# Altium PCB DTMF-FSK.PcbDoc
Units mil, origin at the board's own origin, x right, y up, seen from the top; angles counter-clockwise.
Board outline 1965 x 2035 mil, 2 copper layers (Top Layer, Bottom Layer); 52 components, 40 nets, 154 pads, 7 vias.
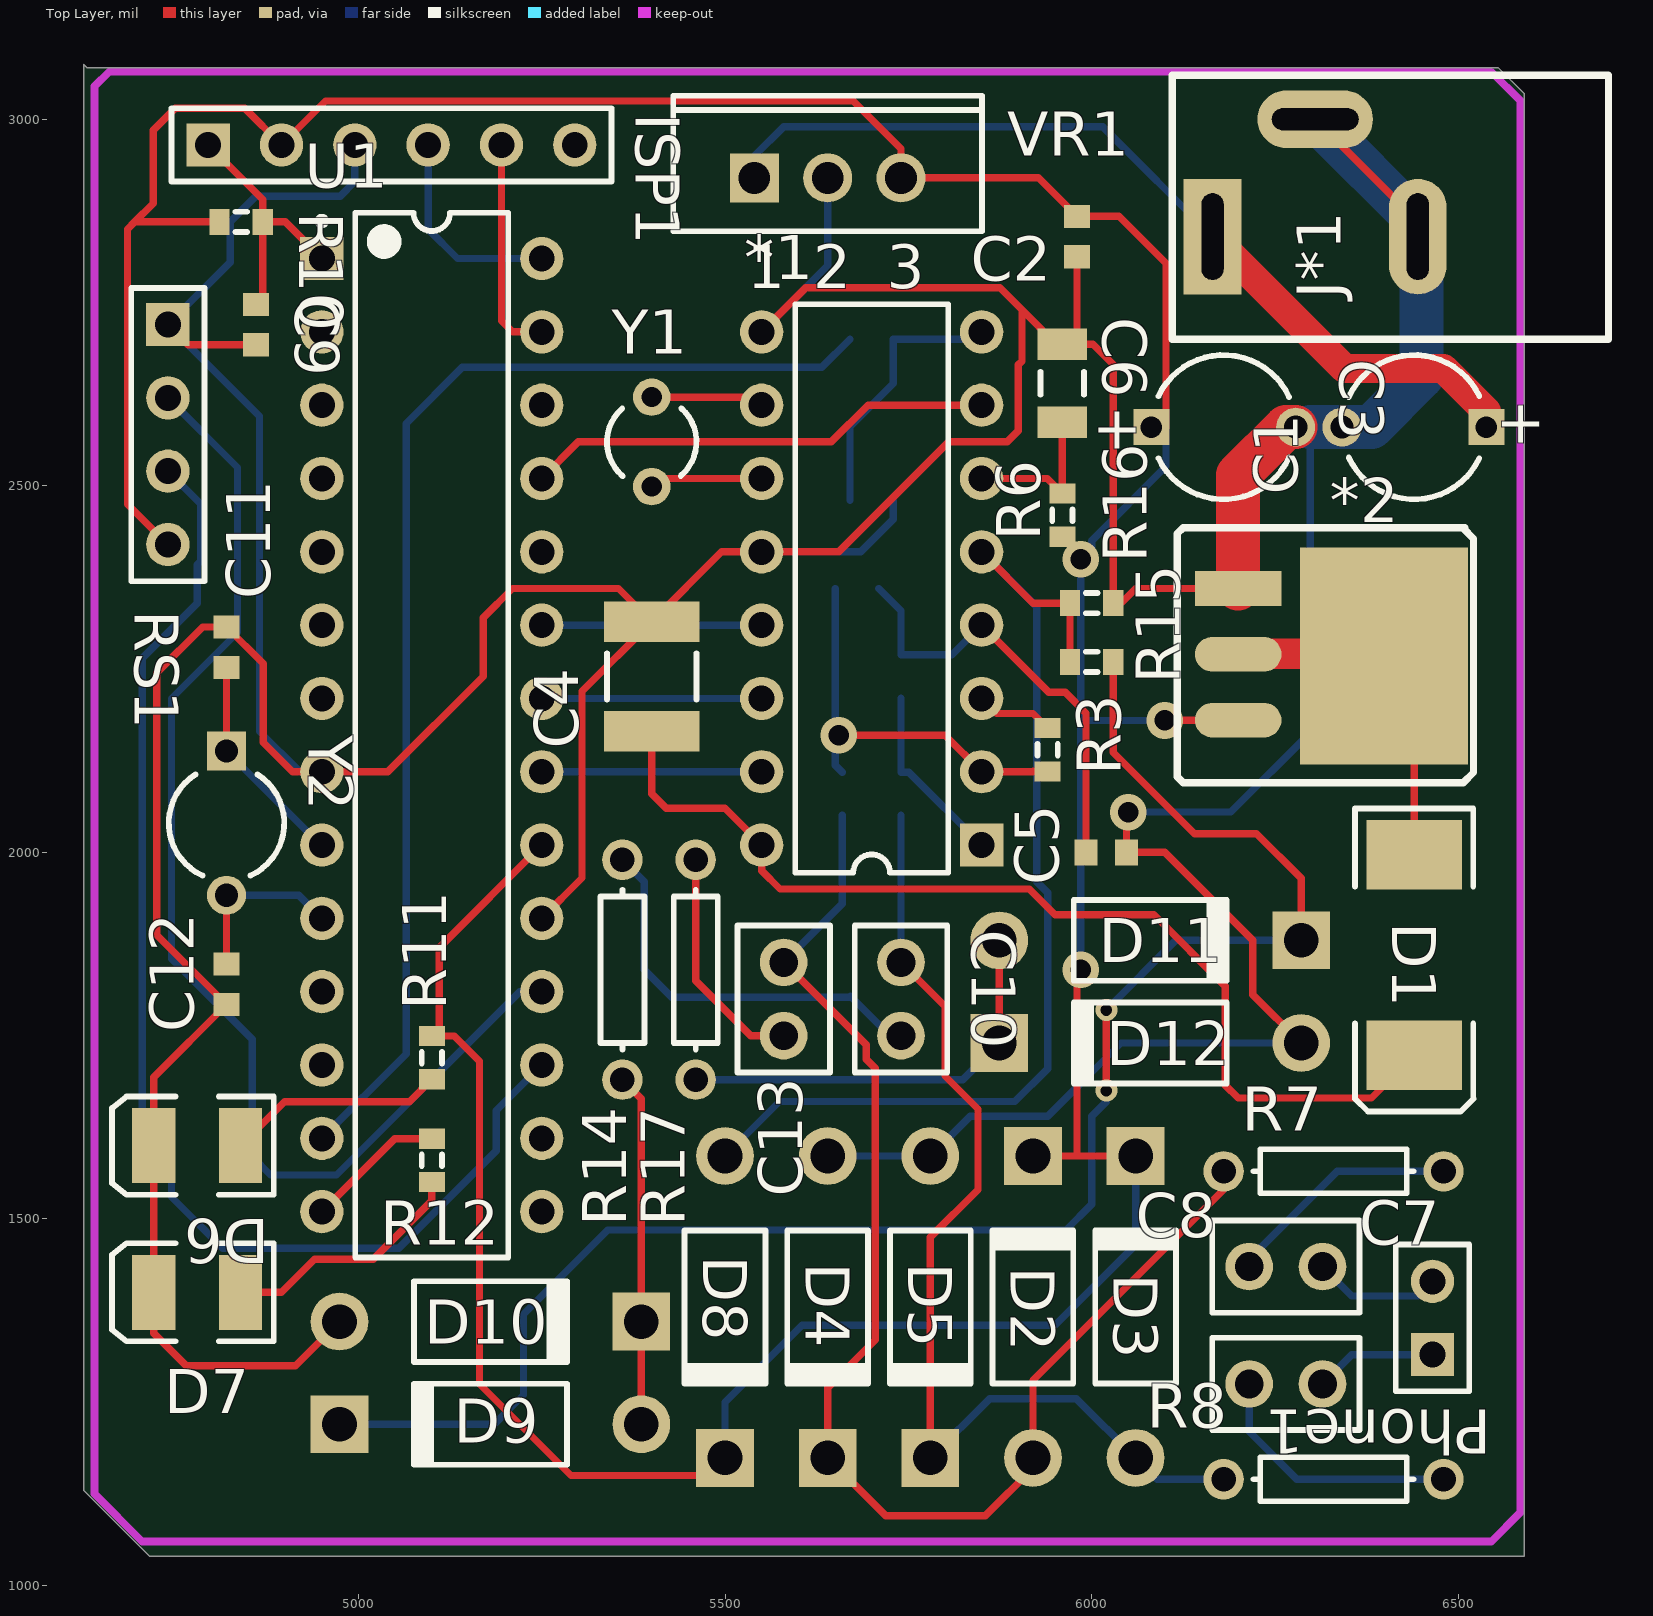
[diagram p0: Top Layer view]
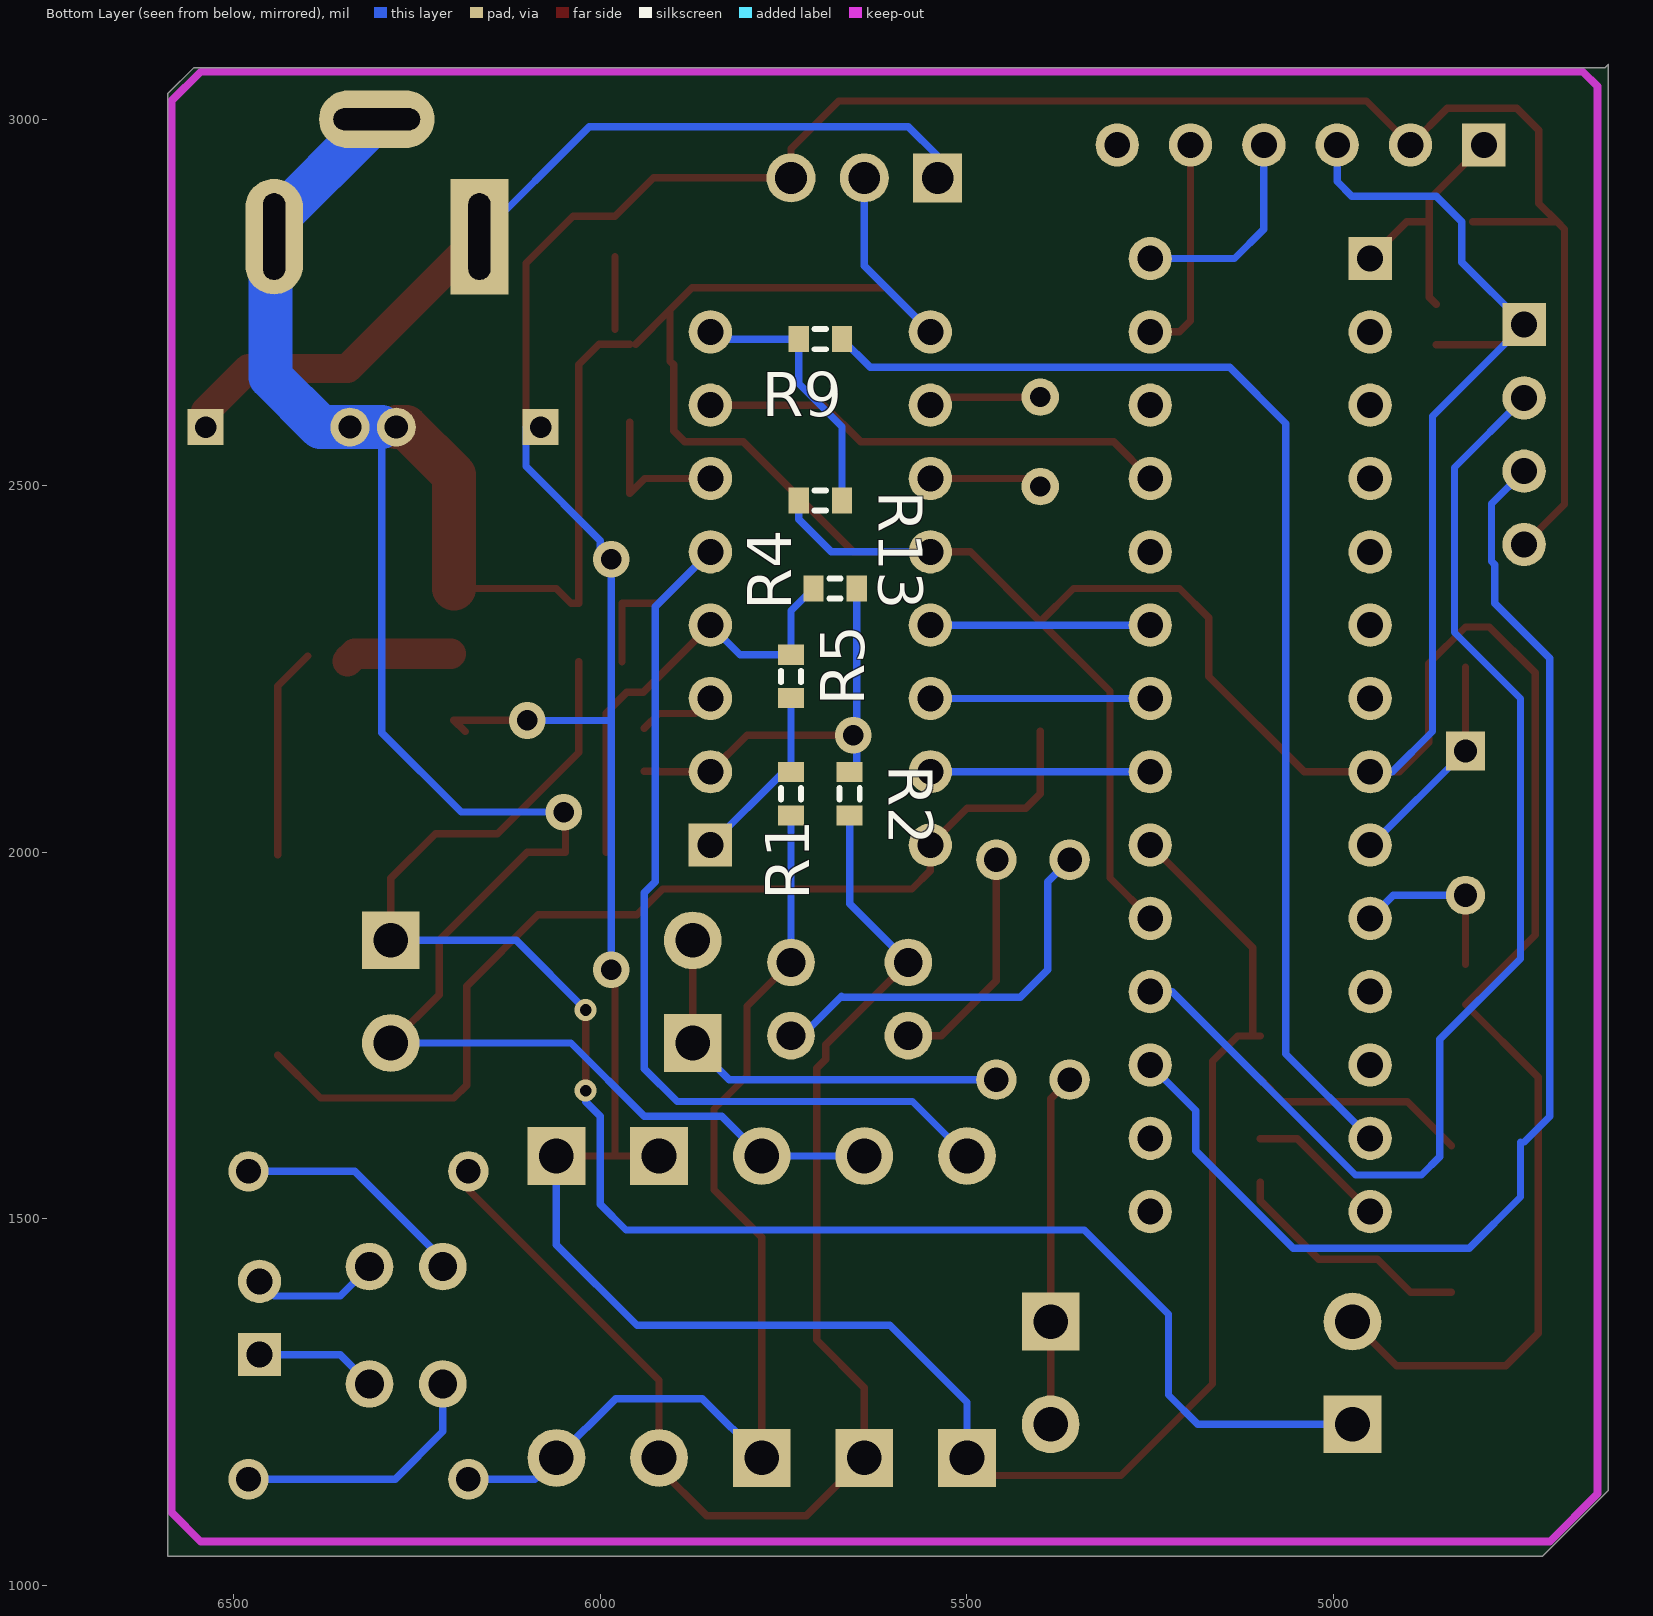
[diagram p1: Bottom Layer view, seen from below]

## Layer stack, top to bottom
Top Layer: signal copper 1.4
Dielectric: dielectric 12.6, FR-4, Dk 4.8
Bottom Layer: signal copper 1.4

## Board outline
4625,3075 4630,3070 6550,3070 6555,3070 6590,3035 6590,1040 4715,1040 4625,1130

## Design rules (kind name [scope] priority, off if disabled: settings)
Clearance Clearance_4 [InNamedPolygon('Bottom Layer-No Net') Or  InNamedPolygon('Bottom Layer-No Net')] p1: gap=30
Clearance Clearance_3 [InNamedPolygon('Bottom Layer-No Net')] p2: gap=30
Clearance Clearance_2 [InNet() And OnLayer()] p3: gap=30
Clearance Clearance_1 [InNamedPolygon('Bottom Layer-No Net') Or  InNamedPolygon('Bottom Layer-No Net')] p4: gap=30
Clearance [All] p5: gap=10
PolygonConnect [All] p1: connectstyle=Relief reliefconductorwidth=10 reliefentries=4 polygonreliefangle="90 Angle"
RoutingVias [All] p1: holewidth=28 width=50 viastyle="Through Hole" minholewidth=28 minwidth=50 maxholewidth=28 maxwidth=50
SilkscreenOverComponentPads [All] p1: minsilkscreentomaskgap=10
SolderMaskExpansion [All] p1: expansion=4
Width [All] p1: maxlimit=80 minlimit=10 preferedwidth=10
27 further rules are at their usual default settings.

## Components (designator, comment, footprint, x,y, rotation, side; value= is the part's Value field where it differs from the comment)
*1 "SM8223" NE016 5700,2360 r90 top
*2 "LM1117" LM1117 6200,2360 r270 top
C1 "Cap Pol1" CAPPR5-5x5 6440,2580 r180 top
C2 "Cap Semi" CAPC1608L 5980,2840 r90 top
C3 "Cap Pol1" CAPPR5-5x5 6180,2580 r0 top
C4 "Cap Pol3" CAPC4532L 5400,2240 r90 top
C5 "Cap Semi" CAPC1608L 6020,2000 r180 top
C6 "Cap Semi" CAPC3216L 5960,2640 r270 top
C7 "Cap" CAPR2.54-5.1x3.2 6265,1435 r0 top
C8 "Cap" CAPR2.54-5.1x3.2 6265,1275 r0 top
C9 "Cap Pol1" CAPC1608L 4860,2720 r270 top
C10 "Cap" CAPR2.54-5.1x3.2 5740,1800 r270 top
C11 "Cap Semi" CAPC1608L 4820,2280 r90 top
C12 "Cap Semi" CAPC1608L 4820,1820 r270 top
C13 "Cap" CAPR2.54-5.1x3.2 5580,1800 r270 top
D1 "Diode" DSO-C2/X3.3 6440,1860 r270 top
D2 "Diode 1N4004" DIO10.46-5.3x2.8 5920,1380 r90 top
D3 "Diode 1N4004" DIO10.46-5.3x2.8 6060,1380 r90 top
D4 "Diode 1N4004" DIO10.46-5.3x2.8 5640,1380 r270 top
D5 "Diode 1N4004" DIO10.46-5.3x2.8 5780,1380 r270 top
D6 "LED3" DSO-C2/D5.6 4780,1600 r180 top
D7 "LED3" DSO-C2/D5.6 4780,1400 r180 top
D8 "Diode 1N4001" DIO10.46-5.3x2.8 5500,1380 r270 top
D9 "Diode 1N4004" DIO10.46-5.3x2.8 5180,1220 r180 top
D10 "Diode 1N4004" DIO10.46-5.3x2.8 5180,1360 r0 top
D11 "Diode 1N4004" DIO10.46-5.3x2.8 6080,1880 r0 top
D12 "Diode 1N4004" DIO10.46-5.3x2.8 6080,1740 r180 top
ISP1 "Header 6" HDR1X6 4795,2965 r0 top
J*1 "Jac_DC" Jac_DC 6900,2980 r180 top
Phone1 "Header 2" HDR1X2 6465,1315 r90 top
R1 "Res3" RESC1608L 5740,2080 r270 bottom
R2 "Res3" RESC1608L 5660,2080 r270 bottom
R3 "Res3" RESC1608L 5940,2140 r90 top
R4 "Res3" RESC1608L 5680,2360 r180 bottom
R5 "Res3" RESC1608L 5740,2240 r270 bottom
R6 "Res3" RESC1608L 5960,2460 r90 top
R7 "Res1" AXIAL-0.3 6330,1565 r0 top
R8 "Res1" AXIAL-0.3 6330,1145 r0 top
R9 "Res3" RESC1608L 5700,2700 r0 bottom
R10 "Res3" RESC1608L 4840,2860 r0 top
R11 "Res3" RESC1608L 5100,1720 r90 top
R12 "Res3" RESC1608L 5100,1580 r270 top
R13 "Res3" RESC1608L 5700,2480 r180 bottom
R14 "Res1" AXIAL-0.3 5360,1840 r90 top
R15 "Res3" RESC1608L 6000,2260 r180 top
R16 "Res3" RESC1608L 6000,2340 r180 top
R17 "Res1" AXIAL-0.3 5460,1840 r90 top
RS1 "Header 4" HDR1X4 4740,2720 r270 top
U1 "PIC16F876A-E/SP" SPDIP300-SP28 5100,2160 r0 top
VR1 "Volt Reg" TO-220 5640,2920 r0 top
Y1 "XTAL" BCY-W2/D3.1 5400,2560 r0 top
Y2 "XTAL" CAPR5-4X5 4820,2040 r270 top

## Footprints (in the part's own frame and the unit in brackets; to place one, negate y for a bottom-side part, rotate by r counter-clockwise, add the part's x,y. Pads: shape width x height; smd on the part's side, far side on the other; paste and mask are expansions set on the pad)
AXIAL-0.3 [mm] "Axial Device, Thru-Hole; 2 Leads; 0.3 in Pin Spacing"
  round 1.4 hole 0.85: 1(-3.81,0) 2(3.81,0)
  silkscreen extent -2.77,-0.76 2.77,0.76
BCY-W2/D3.1 [mm] "Crystal, Thru-Hole; 2 Leads; Body 3.1 x 8.2 mm (Dia.xH)"
  round 1.3 hole 0.7: 1(0,1.55) 2(0,-1.55)
  silkscreen extent -1.55,-1.19 1.55,1.17
CAPC1608L [mm] "Chip Capacitor, Body 1.6x0.8mm, IPC High Density"
  rect 0.8x0.9 smd: 1(-0.7,0) 2(0.7,0)
  body extent -0.87,-0.48 0.87,0.48, height 1.3
CAPC3216L [mm] "Chip Capacitor, Body 3.2x1.6mm, IPC High Density"
  rect 1.1x1.7 smd: 1(-1.35,0) 2(1.35,0)
  silkscreen extent -0.4,-0.75 0.4,0.75, body extent -1.7,-0.9 1.7,0.9, height 1.3
CAPC4532L [mm] "Chip Capacitor, Body 4.5x3.2mm, IPC High Density"
  rect 1.4x3.3 smd: 1(-1.9,0) 2(1.9,0)
  silkscreen extent -0.8,-1.55 0.8,1.55, body extent -2.4,-1.7 2.4,1.7, height 1.4
CAPPR5-5x5 [mm] "Capacitor, Electrolytic, Radial; Body 5 x 5 mm (Dia.xH typ); Pin Spacing 5 mm (typ)"
  rect 1.25x1.25 hole 0.75: 1(-2.5,0)
  round 1.35 hole 0.8: 2(2.5,0)
  silkscreen extent -2.26,-2.5 2.27,2.5
CAPR2.54-5.1x3.2 [mm] "Capacitor, Ceramic, Thru-Hole, Dipped Radial; Body 5.1 x 3.2 mm (WxT) Pin Spacing 2.54 mm (typ)"
  round 1.65 hole 1: 1(-1.27,0) 2(1.27,0)
  silkscreen extent -2.55,-1.6 2.55,1.6
CAPR5-4X5 [mm] "Capacitor; 2 Leads"
  rect 1.35x1.35 hole 0.8: 1(-2.5,0)
  round 1.35 hole 0.8: 2(2.5,0)
  silkscreen extent -1.69,-2 1.82,2
DIO10.46-5.3x2.8 [mm] "Diode, Axial; Body 5.2 x 2.7 mm (LxDia. max), Lead Dia. 0.86 mm (max)"
  round 2 hole 1.2: 1(-5.23,0)
  rect 2x2 hole 1.2: 2(5.23,0)
  silkscreen extent -2.65,-1.4 2.75,1.4
DSO-C2/D5.6 [mm] "SM LED; 2 C-Bend Leads; Body 3.5 x 2.8 x 1.9 mm, inc leads (LxWxH typ)"
  rect 1.5x2.6 smd: 1(-1.5,0) 2(1.5,0)
  silkscreen extent -2.65,-1.7 2.95,1.7
DSO-C2/X3.3 [mm] "DO-214-AB/SMC; 2 C-Bend Leads; Body 7.9 x 5.9 mm, inc. leads (LxW)"
  rect 2.4x3.3 smd: 1(-3.475,0) 2(3.475,0)
  silkscreen extent -5.07,-2.05 5.43,2.05
HDR1X2 [mm] "Connector; Header; 2 Position"
  rect 1.5x1.5 hole 0.9: 1(0,0)
  round 1.5 hole 0.9: 2(2.54,0)
  silkscreen extent -1.27,-1.27 3.81,1.27
HDR1X4 [mm] "Connector; Header; 4 Position"
  rect 1.5x1.5 hole 0.9: 1(0,0)
  round 1.5 hole 0.9: 2(2.54,0) 3(5.08,0) 4(7.62,0)
  silkscreen extent -1.27,-1.27 8.89,1.27
HDR1X6 [mm] "Connector; Header; 6 Position"
  rect 1.5x1.5 hole 0.9: 1(0,0)
  round 1.5 hole 0.9: 2(2.54,0) 3(5.08,0) 4(7.62,0) 5(10.16,0) 6(12.7,0)
  silkscreen extent -1.27,-1.27 13.97,1.27
Jac_DC [mil]
  rect 78.74x157.48 hole 30 slot 118.11 at 90 deg: 0(735,140)
  oval 157.48x78.74 hole 30 slot 118.11 at 0 deg: 1(595,-20)
  oval 78.74x157.48 hole 30 slot 118.11 at 90 deg: 2(455,140)
  silkscreen extent 195,-80 790,280
LM1117 [mm]
  rect 1.2x3 smd: 1(0,0)
  oval 1.2x3 smd: 2(2.28,0) 3(4.56,0)
  rect 7.524x5.824 smd: 2(2.337,5.055)
  Top Layer lines w1.054: 2.261,0.102 2.261,3.429 2.515,3.683
  silkscreen extent -2.11,-2.11 6.73,8.15
NE016 [mm] "DIP; 16 Leads; Row Spacing 7.62 mm; Pitch 2.54 mm"
  rect 1.5x1.5 hole 0.9: 1(-8.89,-3.81)
  round 1.5 hole 0.9: 2(-6.35,-3.81) 3(-3.81,-3.81) 4(-1.27,-3.81) 5(1.27,-3.81) 6(3.81,-3.81) 7(6.35,-3.81) 8(8.89,-3.81) 9(8.89,3.81) 10(6.35,3.81) 11(3.81,3.81) 12(1.27,3.81) 13(-1.27,3.81) 14(-3.81,3.81) 15(-6.35,3.81) 16(-8.89,3.81)
  silkscreen extent -9.85,-2.65 9.85,2.65
RESC1608L [mm] "Chip Resistor, Body 1.6x0.8mm, IPC High Density"
  rect 0.7x0.9 smd: 1(-0.75,0) 2(0.75,0)
  silkscreen extent -0.2,-0.35 0.2,0.35, body extent -0.85,-0.48 0.85,0.48, height 0.9
SPDIP300-SP28 [mm] "DIP, 28-Leads, Row Spacing 7.62mm, Pitch 2.54mm, Body 34.9x6.8mm"
  rect 1.5x1.5 hole 0.9: 1(-3.81,16.51)
  round 1.5 hole 0.9: 2(-3.81,13.97) 3(-3.81,11.43) 4(-3.81,8.89) 5(-3.81,6.35) 6(-3.81,3.81) 7(-3.81,1.27) 8(-3.81,-1.27) 9(-3.81,-3.81) 10(-3.81,-6.35) 11(-3.81,-8.89) 12(-3.81,-11.43) 13(-3.81,-13.97) 14(-3.81,-16.51) 15(3.81,-16.51) 16(3.81,-13.97) 17(3.81,-11.43) 18(3.81,-8.89) 19(3.81,-6.35) 20(3.81,-3.81) 21(3.81,-1.27) 22(3.81,1.27) 23(3.81,3.81) 24(3.81,6.35) 25(3.81,8.89) 26(3.81,11.43) 27(3.81,13.97) 28(3.81,16.51)
  silkscreen extent -3.93,-18.1 2.65,18.1, body extent -3.55,-18.1 3.55,18.1, height 5.08
TO-220 [mm] "TO, Thru-Hole, Vertical, Heatsink Mounted; 3 In-Line Leads; Pitch 2.54 mm"
  rect 1.7x1.7 hole 1.1: 1(-2.54,0)
  round 1.7 hole 1.1: 2(0,0) 3(2.54,0)
  silkscreen extent -5.35,-1.85 5.35,2.85

## Part data
C1 C3 C9: "Polarized Capacitor (Radial)"
C2 C5 C6 C11 C12: "Capacitor (Semiconductor SIM Model)"
C4: "Polarized Capacitor (Surface Mount)"
C7 C8 C10 C13: "Capacitor"
D1: "Default Diode"
D2 D3 D4 D5 D8 D9 D10 D11 D12: "1 Amp General Purpose Rectifier"
D6 D7: "Typical BLUE SiC LED"
ISP1: "Header, 6-Pin"
Phone1: "Header, 2-Pin"
R1 R2 R3 R4 R5 R6 R7 R8 R9 R10 R11 R12 R13 R14 R15 R16 R17: "Resistor"
RS1: "Header, 4-Pin"
U1: "Enhanced FLASH Microcontroller, 8K (x14-Bit words) FLASH, 368 Bytes RAM, 28-Pin PDIP 300mil, Standard VDD Range, Extended Temperature"
VR1: "Voltage Regulator"
Y1 Y2: "Crystal Oscillator"

## Via types
v1: diameter 50, hole 28, Top Layer to Bottom Layer, 5 vias
v2: diameter 30, hole 16, Top Layer to Bottom Layer, 2 vias

## Nets (pads, with @x,y where several pads share a name; then routed paths per layer and width w, separated by ;. In a path a pad name is that pad's centre, name@x,y a point inside that pad or via, vN(x,y) a via of type N, cw(c..) or ccw(c..) an arc to the next point about the centre after c; other vN are vias at no path point)
3.0V: *1.16 C4.1 D1.2 | length 1420.8
  Top Layer w10: C4.1 5400,2080 5420,2060 5500,2060 *1.16 5550,1975 5575,1950 5915,1950 5950,1915 6085,1915 6182.5,1817.5 6182.5,1682.5 6200,1665 6381.81,1665 D1.2
B+: C1.1 J*1.0 VR1.1 | length 1227.5
  Top Layer w40: J*1.0 6345,2660 6480,2660 6538.43,2601.57 C1.1
  Bottom Layer w10: VR1.1 5540,2950 5580,2990 6015,2990 J*1.0
DO: *1.14 U1.22 | length 300
  Bottom Layer w10: U1.22 *1.14
DV: *1.15 U1.21 | length 300
  Bottom Layer w10: U1.21 *1.15
F/D: *1.13 U1.23 | length 300
  Bottom Layer w10: U1.23 *1.13
GND: *1.9 *1.12 *2.1 C1.2 C2.1 C3.2 C4.2 C5.1 C6.1 C9.2 C11.2 C12.2 D4.1 D5.1 D6.2 D7.2 D10.1 D12.1 ISP1.3 J*1.1 J*1.2 R13.1 R16.1 RS1.1 U1.8 U1.19 VR1.2 | length 9367
  Top Layer w10: RS1.1 4767.56,2692.44 C9.2 ; D10.1 4914.09,1300 4765,1300 4720.94,1344.06 D7.2 D6.2 4720.94,1693.39 C12.2 4725,1887.44 4725,2245 4787.56,2307.56 C11.2 4870,2257.56 4870,2150 4910,2110 U1.8 5040,2110 5170,2240 5170,2320 5210,2360 5354.8,2360 C4.2 ; U1.19 5305,1965 5305,2219.8 C4.2 ; *1.9 5610,2770 5875,2770 5905,2740 ; C6.1@5951.85,2693.15 5905,2740 ; C6.1 6001.85,2693.15 6029.53,2665.47 R16.1 6040,2340 6060,2360 *2.1 *2.1@6200,2380 ; C6.1@5980,2713.15 C2.1 ; v1(6050,2055) 6047.56,2052.56 C5.1 6100,2000 6220,1880 6220,1805.91 D12.1 ; J*1.1 6445,2860 J*1.2 ; C4.2 5495.2,2410 *1.12 5655,2410 5805,2560 5885,2560 5900,2575 5900,2665 5905,2670 5905,2740
  Top Layer w60: *2.1 6200,2515 6265,2580 C3.2
  Bottom Layer w10: U1.8 4920,2110 4865,2165 4865,2595 RS1.1 4825,2805 4825,2860 4860,2895 4975,2895 4995,2915 ISP1.3 ; *1.12 5685,2410 5729.53,2454.53 R13.1 ; *1.9 5640,2800 VR1.2 ; D4.1 D5.1 5834.37,1640.28 5940.28,1640.28 6040,1740 D12.1 ; v1(6050,2055) 6190,2055 6298.43,2163.43 C3.2@6298.43,2580
  Bottom Layer w60: C3.2@6298.43,2580 6381.57,2580 6450,2648.43 6450,2855 J*1.1
IN1: *1.5 D8.1 R15.2 R16.2 | length 1461.1
  Top Layer w10: *1.5 5920,2340 R16.2 R15.2
  Bottom Layer w10: D8.1 5574.37,1660.28 5895.28,1660.28 5940,1705 5940,1945 5925,1960 5925,2335 *1.5
LED1: R12.1 U1.14 | length 191.2
  Top Layer w10: U1.14 5049.53,1609.53 R12.1
Net*1_1: *1.1 R1.1 R5.2 | length 252.2
  Bottom Layer w10: R5.2 R1.1 5750.47,2109.53 *1.1
Net*1_2: *1.2 R2.1 R3.1 R4.2 | length 560.3
  Top Layer w10: v1(5655,2160) 5800,2160 *1.2 5919.53,2110 5920,2110.47 R3.1
  Bottom Layer w10: R4.2 5650.47,2119.05 R2.1
Net*1_3: *1.3 R3.2 | length 106.8
  Top Layer w10: *1.3 5870.47,2189.53 5920,2189.53 R3.2
Net*1_4: *1.4 C5.2 R4.1 R5.1 | length 611.9
  Top Layer w10: *1.4 5941.69,2218.31 5963.93,2218.31 5992.44,2189.8 C5.2
  Bottom Layer w10: R4.1 5740,2329.53 R5.1 5809.53,2269.53 *1.4
Net*1_6: *1.6 C6.2 R6.2 | length 215.8
  Top Layer w10: *1.6 5939.53,2510 R6.2 C6.2
Net*1_10: *1.10 Y1.1 | length 154.6
  Top Layer w10: Y1.1 5538.98,2621.02 *1.10
Net*1_11: *1.11 Y1.2 | length 154.6
  Top Layer w10: Y1.2 5411.02,2510 *1.11
Net*2_2: *2.2 D1.1 | length 288.2
  Top Layer w10: *2.2@6399,2268 6440,2227 D1.1
NetC7_1: C7.1 R7.2 | length 324.7
  Bottom Layer w10: C7.1 6215,1445 6335,1565 R7.2
NetC7_2: C7.2 Phone1.2 | length 174.9
  Bottom Layer w10: C7.2 6355,1395 6445,1395 Phone1.2
NetC8_1: C8.1 R8.2 | length 356.9
  Bottom Layer w10: C8.1 6215,1210 6280,1145 R8.2
NetC8_2: C8.2 Phone1.1 | length 166.6
  Bottom Layer w10: C8.2 6355,1315 Phone1.1
NetC10_2: C10.2 R14.2 | length 550.9
  Bottom Layer w10: R14.2 5390,1960 5390,1840 5427.48,1802.52 5669.67,1802.52 5671.07,1803.93 5725,1750 C10.2
NetC13_2: C13.2 R17.2 | length 316.1
  Top Layer w10: R17.2 5460,1825 5535,1750 C13.2
NetD6_1: D6.1 R11.1 | length 298.4
  Top Layer w10: D6.1 4899.06,1660 5069.53,1660 R11.1
NetD7_1: D7.1 R12.2 | length 338.2
  Top Layer w10: D7.1 4895,1400 4940,1445 5020,1445 5100,1525 R12.2
NetD9_1: D9.1 D10.2 R14.1 | length 480.7
  Top Layer w10: R14.1 5385.91,1664.09 D10.2 D9.1
NetD9_2: D9.2 D11.2 R15.1 | length 2328.9
  Top Layer w10: v2(6020,1675) v2(6020,1785) ; R15.1 6029.53,2136.38 6140.45,2025.45 6225,2025.45 6285.91,1964.55 D11.2
  Bottom Layer w10: D9.2 5185,1220 5225,1260 5225,1370 5340,1485 5965,1485 6000,1520 6000,1640 6020,1660 v2(6020,1675) ; v2(6020,1785) 6115,1880 D11.2
NetD11_1: D11.1 D12.2 R17.1 | length 574.8
  Top Layer w10: D12.2 D11.1
  Bottom Layer w10: R17.1 5824.09,1690 D12.2
NetR9_1: R9.1 U1.13 | length 1675.7
  Bottom Layer w10: U1.13 5065,1725 5065,2585 5141.61,2661.61 5632.09,2661.61 R9.1
PGC: ISP1.5 U1.27 | length 301.2
  Top Layer w10: ISP1.5 5195,2725 5210,2710 U1.27
PGD: ISP1.4 U1.28 | length 286.6
  Bottom Layer w10: ISP1.4 5095,2850 5135,2810 U1.28
PWN: *1.8 R9.2 R13.2 | length 369.1
  Bottom Layer w10: R13.2 5670.47,2580.47 5729.53,2639.53 R9.2 5840,2700 *1.8
RDE: *1.7 U1.25 | length 641.4
  Top Layer w10: U1.25 5300,2560 5645,2560 5695,2610 *1.7
RING: C13.1 D2.1 D4.2 R2.2 R7.1 | length 1840.6
  Top Layer w10: C13.1 5692.52,1737.48 5692.52,1717.85 5705,1705.37 5705,1335 5640,1270 D4.2 5719.09,1095 5855,1095 5920,1160 D2.1 5920,1280 6180,1540 R7.1
  Bottom Layer w10: C13.1 5660,1930 R2.2
RST: C9.1 ISP1.1 R10.2 U1.1 | length 353.4
  Top Layer w10: ISP1.1 4869.53,2890.47 R10.2 ; C9.1 4869.53,2757.09 R10.2 ; U1.1 4900,2860 R10.2
RXD: RS1.2 U1.18 | length 1666.1
  Bottom Layer w10: RS1.2 4835,2525 4835,2300 4745,2210 4745,1855 4855,1745 4855,1585 4880,1560 4970,1560 5220,1810 U1.18
TIP: C10.1 D3.1 D5.2 R1.2 R8.1 | length 1425.9
  Top Layer w10: C10.1 5800,1790 5800,1695 5845,1650 5845,1540 5780,1475 D5.2
  Bottom Layer w10: C10.1 R1.2 ; D5.2 5860.91,1255 5979.09,1255 D3.1 6089.09,1145 R8.1
TXD: RS1.3 U1.17 | length 1725.6
  Bottom Layer w10: 4740,1605 4705.9,1639.1 4705,1640 4705,2265 4780,2340 4780,2392.5 4784.53,2397.03 4784.53,2475.47 RS1.3 ; 4745,1605 4745,1530 4815,1460 5055,1460 5188.05,1593.05 5188.05,1648.05 U1.17
VCC: *2.3 C2.2 C3.1 D2.2 D3.2 D8.2 ISP1.2 R6.1 R10.1 R11.2 RS1.4 U1.20 VR1.3 | length 6049.1
  Top Layer w10: RS1.4 4685,2475 4685,2850 4695,2860 ; R10.1 4695,2860 ; R11.2 R11.2@5110,1749.53 ; U1.20 5110,1870 R11.2@5110,1749.53 ; D8.2 5475.91,1150 5290,1150 5165,1275 5165,1715 5130.47,1749.53 R11.2@5110,1749.53 ; D2.2@5950,1615.91 D2.2 5980,1585.91 ; v1(5985,1840) 5980,1835 5980,1585.91 ; D3.2 5980,1585.91 ; v1(6100,2180) 6100.47,2180.47 *2.3 *2.3@6184.53,2165 ; C3.1@6101.57,2580 6101.57,2803.43 6037.44,2867.56 C2.2 5927.56,2920 VR1.3 5740,2960 5675,3025 4955,3025 ISP1.2 4845,3015 4750,3015 4720,2985 4720,2885 4695,2860
  Bottom Layer w10: D8.2 5500,1250 5605,1355 5950,1355 6060,1465 D3.2 ; v1(5985,1840) 5985,2180 ; v1(6100,2180) 5985,2180 ; C3.1@6101.57,2580 6101.57,2526.57 6000,2425 6000,2400 v1(5985,2400) 5985,2180
X1: C11.1 U1.9 Y2.1 | length 297.2
  Top Layer w10: Y2.1 C11.1
  Bottom Layer w10: Y2.1 4948.43,2010 U1.9
X2: C12.1 U1.10 Y2.2 | length 237.1
  Top Layer w10: C12.1 Y2.2
  Bottom Layer w10: Y2.2 4918.43,1941.57 U1.10
pads on no net: ISP1.6 U1.2 U1.3 U1.4 U1.5 U1.6 U1.7 U1.11 U1.12 U1.15 U1.16 U1.24 U1.26

## Keep-outs
Keep-Out Layer:
  lines w10.5: 4640,1125 4705,1060 6545,1060 6585,1100 6585,3025 6545,3065 4660,3065 4640,3045 4640,1125

## Text inside footprints (layer, text, board x,y; h text height)
C1: Top Overlay "+" at 6619.13,2609.53 h59.06 r180
C3: Top Overlay "+" at 6000.87,2550.47 h59.06
VR1: Top Overlay "3" at 5720.31,2769.41 h59.06; Top Overlay "2" at 5620.31,2769.41 h59.06; Top Overlay "1" at 5530.16,2769.41 h59.06